# EAGLE board encoder (EAGLE 6.4)
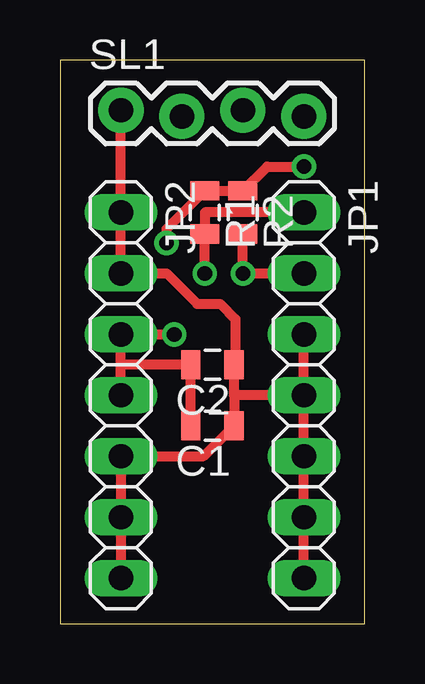
[diagram p0: board, top side]
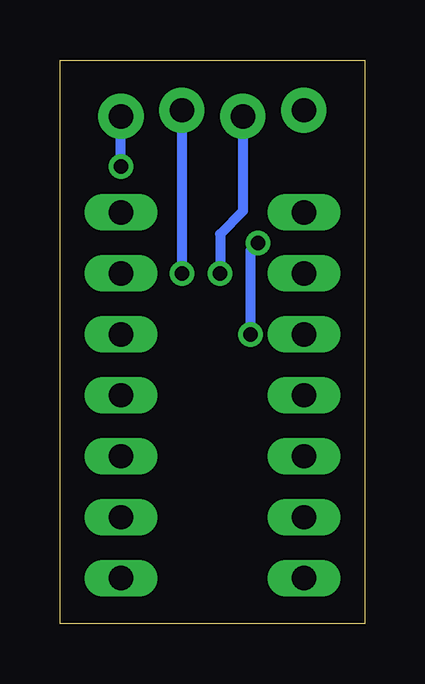
[diagram p1: board, bottom side, seen from below]

Size 12.7 x 23.49 mm. Coordinates in mm from the lower left corner, seen from the top.
Outline: 0,0 12.7,0 12.7,23.49 0,23.49 0,0
Copper layers (1*16): Top 0.035mm / dielectric 1.5mm / Bottom 0.035mm
Design rules "default *": minimum track width 10mil, minimum drill 24mil, track to track 8mil, track to pad 8mil, pad to pad 8mil, via to via 8mil, smd to smd 8mil, copper to edge 40mil, drill to drill 8mil, minimum pad ring 10mil, minimum via ring 8mil, stop-mask expansion 4mil, vias tented up to drill 0mil, thermal gap 10mil

## Footprints (pad centres in the part's own frame; a part is rotated, then mirrored left to right if it is on the bottom)
0805 = smd 0.8 x 1.2: 1 -0.9,0; 2 0.9,0
1X07 = drill 1.016 long: 1 -7.62,0; 2 -5.08,0; 3 -2.54,0; 4 0,0; 5 2.54,0; 6 5.08,0; 7 7.62,0
1X04_LOCK = drill 1.016 pad 1.88: 1 0,0.127; 2 2.54,-0.127; 3 5.08,0.127; 4 7.62,-0.127

## Placement (x,y rotation side)
C1  47uF  [0805]  6.35,8.26 180 top
C2  .1uF  [0805]  6.35,10.79 180 top
JP1  [1X07]  10.16,9.53 270 top
JP2  [1X07]  2.54,9.53 270 top
R1  4.7k  [0805]  6.03,17.15 270 top
R2  4.7k  [0805]  7.62,17.15 270 top
SL1  [1X04_LOCK]  2.54,21.27 0 top

## Library data of the parts
C1 C2 R1 R2 SL1 = ASL
JP1 JP2 = baro

## Nets
GND: C1.1 C2.1 JP1.3 JP1.4 JP1.5 JP1.6 JP1.7 JP2.1 JP2.2 JP2.5 JP2.6 JP2.7 SL1.1
N$1: JP1.1 R1.2 SL1.2
N$2: JP1.2 R2.2 SL1.3
VCC: C1.2 C2.2 JP2.3 JP2.4 R1.1 R2.1 SL1.4

## Tracks (layer width: path | path; a pad name or v marks a point on that pad's centre or on a via)
GND
  Top 0.406: JP1.4 JP1.3 | 7.25,9.53 C1.1 5.98,6.98 JP2.5 JP2.6 JP2.7 | JP1.7 JP1.6 JP1.5 JP1.4 | JP1.4 7.25,9.53 | 7.25,9.53 C2.1 7.3,10.85 7.3,12.7 6.67,13.33 5.71,13.33 4.45,14.6 JP2.2 JP2.1 SL1.1
N$1  (via drill 0.61)
  Top 0.406: JP1.1 6.03,17.15 R1.2 v6.03,14.6
  Bottom 0.406: SL1.2 5.08,17.2 R1.2 v6.03,14.6
N$2  (via drill 0.61)
  Top 0.406: R2.2 v7.62,14.6 JP1.2
  Bottom 0.406: SL1.3 v7.62,14.6
VCC  (via drill 0.61)
  Top 0.406: C1.2 C2.2 2.54,10.79 | JP2.4 2.54,10.79 | 2.54,10.79 JP2.3 v4.76,12.06 | v10.16,19.05 8.62,19.05 R2.1 R1.1 4.45,16.46 v4.45,15.87
  Bottom 0.406: v10.16,19.05 SL1.4 | v4.76,12.06 4.76,15.56 v4.45,15.87